# Altium PCB Sample_FPC_FFC_TestBoard_v1.PcbDoc
Units mil, origin at the board's own origin, x right, y up, seen from the top; angles counter-clockwise.
Board outline 560.03 x 710.03 mil, 2 copper layers (Top Layer, Bottom Layer); 2 components, 5 nets, 12 pads, 0 vias.
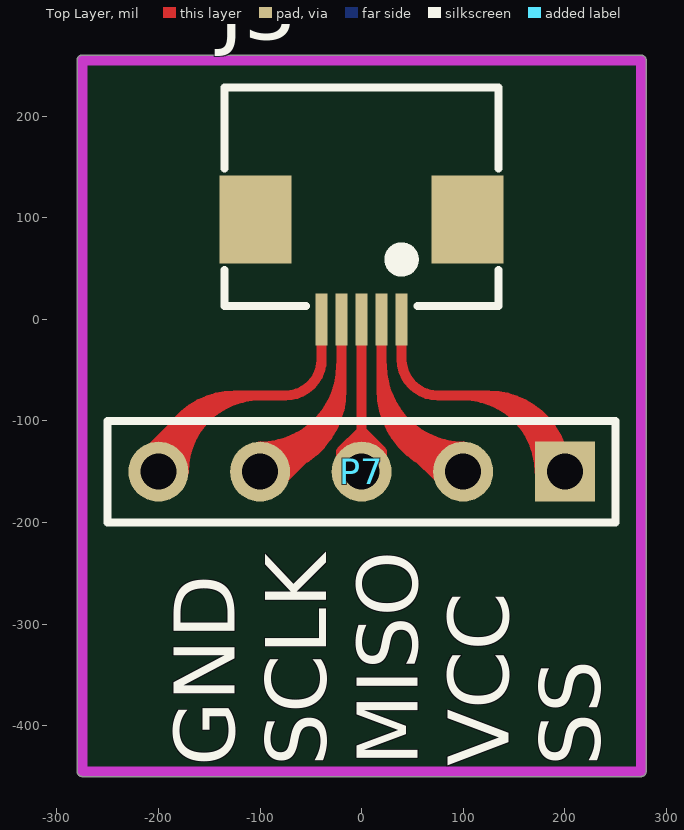
[diagram p0: Top Layer view]
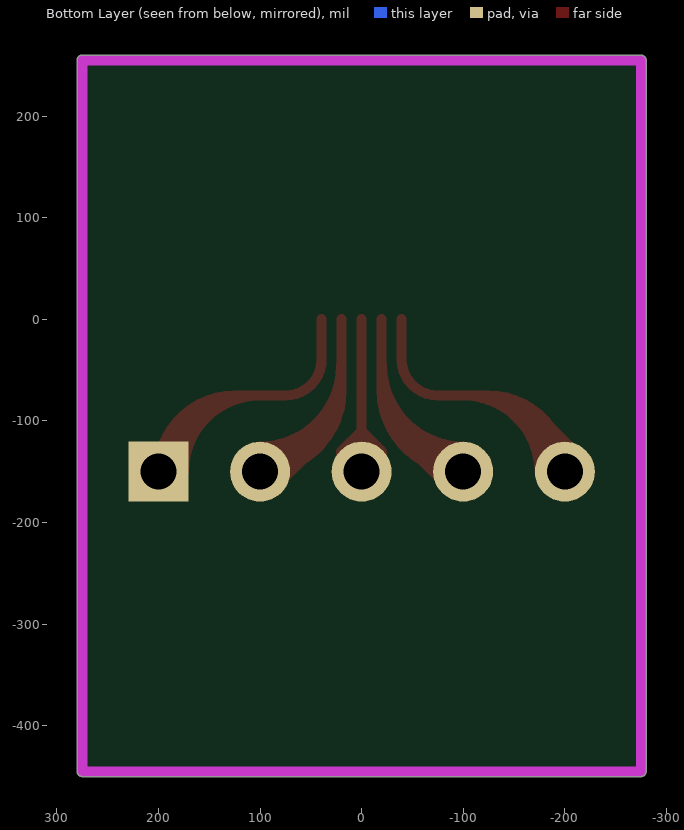
[diagram p1: Bottom Layer view, seen from below]

## Layer stack, top to bottom
Top Solder: solder mask 0.4, Solder Resist, Dk 3.5
Top Layer: signal copper 1.4
Dielectric 1: dielectric 12.6, FR-4, Dk 4.8
Bottom Layer: signal copper 1.4
Bottom Solder: solder mask 0.4, Solder Resist, Dk 3.5

## Board outline
-280.02,-445 ccw(c-275,-445) -275,-450.02 275,-450.02 ccw(c275,-445) 280.01,-445 280.01,255 ccw(c275,255) 275,260.01 -275,260.01 ccw(c-275,255) -280.02,255

## Design rules (kind name [scope] priority, off if disabled: settings)
Clearance [All] p1: gap=7.87 ignorepadtopadclearanceinfootprint=FALSE
PolygonConnect [All] p1: connectstyle=Relief reliefconductorwidth=10 reliefentries=4 polygonreliefangle="90 Angle" airgapwidth=10
RoutingVias [All] p1: holewidth=28 width=50 viastyle="Through Hole" minholewidth=28 minwidth=50 maxholewidth=28 maxwidth=50
SolderMaskExpansion [All] p1: expansion=4 istentingtop=FALSE
Width [All] p1: maxlimit=10 minlimit=10 preferedwidth=10
30 further rules are at their usual default settings.

## Components (designator, comment, footprint, x,y, rotation, side; value= is the part's Value field where it differs from the comment)
J3 "FPC0.5-5P" FPC0.5-5P 0,98.31 r180 top
P7 "Header 5" HDR1X5 200,-150 r180 top

## Footprints (in the part's own frame and the unit in brackets; to place one, negate y for a bottom-side part, rotate by r counter-clockwise, add the part's x,y. Pads: shape width x height; smd on the part's side, far side on the other; paste and mask are expansions set on the pad)
FPC0.5-5P [mm]
  rect 1.8x2.2 smd: 0(-2.65,0) 0(2.65,0)
  rect 0.3x1.3 smd: 1(-1,2.497) 2(-0.5,2.497) 3(0,2.497) 4(0.5,2.497) 5(1,2.497)
  silkscreen extent -3.42,-3.3 3.42,2.16, body extent -3.35,-3.15 3.35,2.85, height 2
HDR1X5 [mm] "Connector; Header; 4 Position"
  rect 1.5x1.5 hole 0.9: 1(0,0)
  round 1.5 hole 0.9: 2(2.54,0) 3(5.08,0) 4(7.62,0) 5(10.16,0)
  silkscreen extent -1.27,-1.27 11.43,1.27

## Part data
P7: "Header, 4-Pin", LatestRevisionDate=17-Jul-2002, LatestRevisionNote="Re-released for DXP Platform.", Publisher="Altium Limited"

## Nets (pads, with @x,y where several pads share a name; then routed paths per layer and width w, separated by ;. In a path a pad name is that pad's centre, name@x,y a point inside that pad or via, vN(x,y) a via of type N, cw(c..) or ccw(c..) an arc to the next point about the centre after c; other vN are vias at no path point)
GND: J3.5 P7.5 | length 430.5
  Top Layer w10: P7.5@-215,-135 -180,-100 ; P7.5 cw(c-125,-150) -125,-75 -75,-75 ccw(c-75,-39.37) -39.37,-39.37 J3.5 ; P7.5@-175,-150 cw(c-100,-150) -100,-75
MISO: J3.3 P7.3 | length 216.6
  Top Layer w10: P7.3@-20,-135 -20,-130 0,-110 20,-130 P7.3@20,-135 ; P7.3 J3.3
SCLK: J3.4 P7.4 | length 371.5
  Top Layer w10: P7.4@-100.31,-125.31 ccw(c-100.31,-45) -20,-45 ; P7.4 ccw(c-100,-69.69) -19.69,-69.69 J3.4 ; P7.4@-90,-170 -55,-135
SS: J3.1 P7.1 | length 381
  Top Layer w10: J3.1 39.37,-39.37 ccw(c75,-39.37) 75,-75 125,-75 cw(c125,-150) P7.1 ; 100,-75 cw(c100,-150) P7.1@175,-150
VCC: J3.2 P7.2 | length 378.6
  Top Layer w10: J3.2 19.68,-69.69 ccw(c100,-69.69) P7.2 ; 20,-45 ccw(c100.31,-45) P7.2@100.31,-125.32 ; 45,-125 P7.2@85,-165
pads on no net: J3.0

## Keep-outs
Keep-Out Layer:
  lines w10: -275,-445 -275,255 275,255 275,-445 -275,-445

## Other copper
Top Layer:
  region net VCC: 25,-85 ccw(c85,-85) 85,-145 110,-145
  region net SCLK: -85,-125 -72.47,-125 cw(c-72.47,-135.43) -62.04,-135.43 -62.04,-142.04 cw(c-72.5,-142.04) -72.5,-152.5
  region net SCLK: -25,-80 cw(c-85,-80) -85,-140 -90,-140
  region net GND: -135,-75 ccw(c-135,-135) -195,-135 -195,-160
  region net SS: 140,-80 cw(c140,-135) 195,-135 195,-165

## Silkscreen, mask and mechanical layers (free items; w line width, h text height)
Top Overlay:
  text "GND / SCLK / MISO / VCC / SS" at 235,-440 h60 r90